# EAGLE board Interrdigitated-Electrode-V1 (EAGLE 9.5.2)
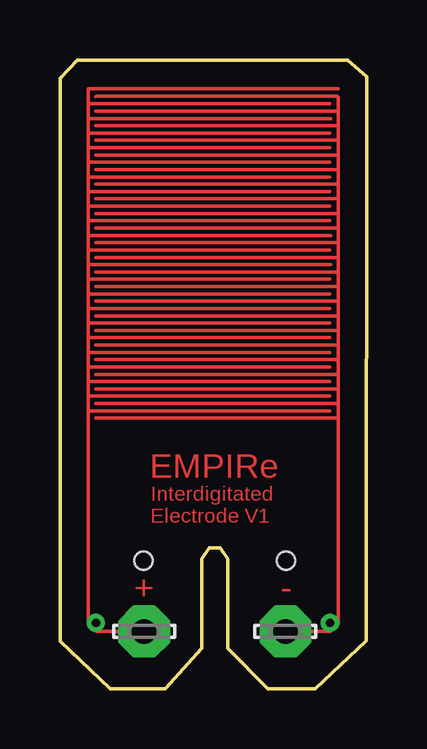
[diagram p0: board, top side]
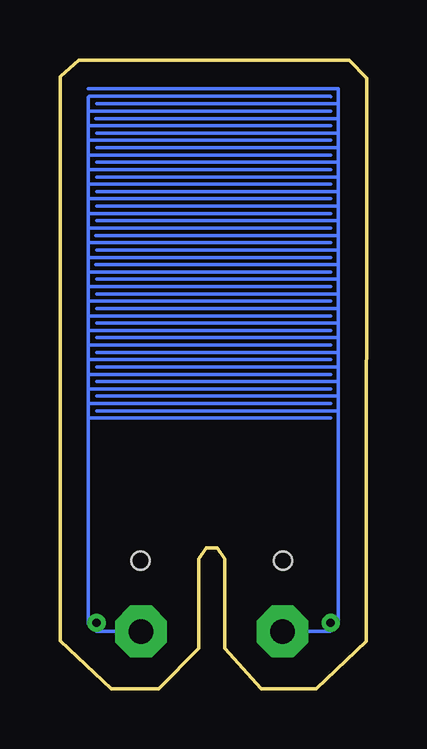
[diagram p1: board, bottom side, seen from below]

Size 12.77 x 26.21 mm. Coordinates in mm from the lower left corner, seen from the top.
Outline: 0.72,26.21 11.99,26.21 12.77,25.52 12.76,1.99 10.64,0 8.66,0 6.98,1.68 6.98,5.41 6.68,5.87 6.22,5.87 5.91,5.41 5.91,1.68 4.39,0 2.1,0 0.01,1.98 0,25.46 0.72,26.21
Copper layers (1*16): Top 0.035mm / dielectric 1.5mm / Bottom 0.035mm
Design rules "default": minimum track width 6mil, minimum drill 0.35mm, track to track 6mil, track to pad 6mil, pad to pad 6mil, via to via 6mil, smd to smd 6mil, copper to edge 40mil, drill to drill 6mil, minimum pad ring 10mil, minimum via ring 8mil, stop-mask expansion 4mil, vias tented up to drill 0mil, thermal gap 10mil
Holes 0.75 mm at 3.48,5.33 9.42,5.33

## Footprints (pad centres in the part's own frame; a part is rotated, then mirrored left to right if it is on the bottom)
LSP10 = drill 1.016 pad 2.159 octagon: MP 0,0

## Placement (x,y rotation side)
LSP1  LSP10  [LSP10]  9.39,2.38 0 top
LSP2  LSP10  [LSP10]  3.5,2.38 0 top
LSP3  LSP10  [LSP10]  9.39,2.38 0 top
LSP4  LSP10  [LSP10]  3.5,2.38 0 top

## Library data of the parts
LSP1-LSP4 = solpad

## Nets
0: LSP2.MP
1: LSP4.MP
VCC: LSP1.MP
VCC1: LSP3.MP

## Tracks (layer width: path | path; a pad name or v marks a point on that pad's centre or on a via)
0
  Top 0.152: LSP2.MP 1.5,2.38 1.18,2.7 1.18,11.58 | 1.18,11.58 1.18,12.19 | 1.18,12.19 1.18,12.8 | 1.18,12.8 1.18,13.41 | 1.18,13.41 1.18,14.02 | 1.18,14.02 1.18,14.63 | 1.18,14.63 1.18,15.24 | 1.18,15.24 1.18,15.85 | 1.18,15.85 1.18,16.46 | 1.18,16.46 1.18,17.07 | 1.18,17.07 1.18,17.68 | 1.18,17.68 1.18,18.29 | 1.18,18.29 1.18,18.9 | 1.18,18.9 1.18,19.51 | 1.18,19.51 1.18,20.12 | 1.18,20.12 1.18,20.73 | 1.18,20.73 1.18,21.34 | 1.18,21.34 1.18,21.95 | 1.18,21.95 1.18,22.55 | 1.18,22.55 1.18,23.16 | 1.18,23.16 1.18,23.77 | 1.18,23.77 1.18,24.38 | 1.18,24.38 1.18,25 11.58,25 | 1.18,24.38 11.25,24.38 | 1.18,23.77 11.28,23.77 | 1.18,23.16 11.25,23.16 | 1.18,22.55 11.25,22.55 | 1.18,21.95 11.25,21.95 | 1.18,21.34 11.25,21.34 | 1.18,20.73 11.25,20.73 | 1.18,20.12 11.25,20.12 | 1.18,19.51 11.25,19.51 | 1.18,18.9 11.28,18.9 | 1.18,18.29 11.25,18.29 | 1.18,17.68 11.28,17.68 | 1.18,17.07 11.25,17.07 | 1.18,16.46 11.25,16.46 | 1.18,15.85 11.25,15.85 | 11.25,15.24 1.18,15.24 | 1.18,14.63 11.25,14.63 | 1.18,14.02 11.25,14.02 | 1.18,13.41 11.25,13.41 | 1.18,12.8 11.25,12.8 | 1.18,12.19 11.25,12.19 | 1.18,11.58 11.25,11.58
1
  Bottom 0.152: LSP4.MP 1.5,2.38 1.18,2.7 1.18,11.58 | 1.18,11.58 1.18,12.19 | 1.18,12.19 1.18,12.8 | 1.18,12.8 1.18,13.41 | 1.18,13.41 1.18,14.02 | 1.18,14.02 1.18,14.63 | 1.18,14.63 1.18,15.24 | 1.18,15.24 1.18,15.85 | 1.18,15.85 1.18,16.46 | 1.18,16.46 1.18,17.07 | 1.18,17.07 1.18,17.68 | 1.18,17.68 1.18,18.29 | 1.18,18.29 1.18,18.9 | 1.18,18.9 1.18,19.51 | 1.18,19.51 1.18,20.12 | 1.18,20.12 1.18,20.73 | 1.18,20.73 1.18,21.34 | 1.18,21.34 1.18,21.95 | 1.18,21.95 1.18,22.55 | 1.18,22.55 1.18,23.16 | 1.18,23.16 1.18,23.77 | 1.18,23.77 1.18,24.38 | 1.18,24.38 1.18,25 11.58,25 | 1.18,24.38 11.25,24.38 | 1.18,23.77 11.28,23.77 | 1.18,23.16 11.25,23.16 | 1.18,22.55 11.25,22.55 | 1.18,21.95 11.25,21.95 | 1.18,21.34 11.25,21.34 | 1.18,20.73 11.25,20.73 | 1.18,20.12 11.25,20.12 | 1.18,19.51 11.25,19.51 | 1.18,18.9 11.28,18.9 | 1.18,18.29 11.25,18.29 | 1.18,17.68 11.28,17.68 | 1.18,17.07 11.25,17.07 | 1.18,16.46 11.25,16.46 | 1.18,15.85 11.25,15.85 | 11.25,15.24 1.18,15.24 | 1.18,14.63 11.25,14.63 | 1.18,14.02 11.25,14.02 | 1.18,13.41 11.25,13.41 | 1.18,12.8 11.25,12.8 | 1.18,12.19 11.25,12.19 | 1.18,11.58 11.25,11.58
N$1  (via drill 0.35)
  other vias: 1.49,2.74
N$2  (via drill 0.35)
  other vias: 11.25,2.74
N$3  (via drill 0.35)
  other vias: 1.49,2.74
N$4  (via drill 0.35)
  other vias: 11.25,2.74
VCC
  Top 0.152: LSP1.MP 11.26,2.38 11.58,2.7 11.58,11.28 | 1.49,24.69 1.51,24.7 11.55,24.7 11.58,24.67 11.58,24.08 | 11.58,11.28 11.58,11.89 | 11.58,11.89 11.58,12.5 | 11.58,12.5 11.58,13.11 | 11.58,13.11 11.58,13.72 | 11.58,13.72 11.58,14.33 | 11.58,14.33 11.58,14.93 | 11.58,14.93 11.58,15.54 | 11.58,15.54 11.58,16.15 | 11.58,16.15 11.58,16.76 | 11.58,16.76 11.58,17.37 | 11.58,17.37 11.58,17.98 | 11.58,17.98 11.58,18.59 | 11.58,18.59 11.58,19.2 | 11.58,19.2 11.58,19.81 | 11.58,19.81 11.58,20.42 | 11.58,20.42 11.58,21.03 | 11.58,21.03 11.58,21.64 | 11.58,21.64 11.58,22.25 | 11.58,22.25 11.58,22.86 | 11.58,22.86 11.58,23.47 | 11.58,23.47 11.58,24.08 | 11.58,24.08 1.49,24.08 | 11.58,23.47 1.49,23.47 | 11.58,22.86 1.49,22.86 | 11.58,22.25 1.49,22.25 | 11.58,21.64 1.49,21.64 | 11.58,21.03 1.49,21.03 | 11.58,20.42 1.49,20.42 | 11.58,19.81 1.49,19.81 | 11.58,19.2 1.49,19.2 | 11.58,18.59 1.49,18.59 | 11.58,17.98 1.49,17.98 | 11.58,17.37 1.49,17.37 | 11.58,16.76 1.49,16.76 | 11.58,16.15 1.49,16.15 | 11.58,15.54 1.49,15.54 | 11.58,14.93 1.49,14.93 | 11.58,14.33 1.49,14.33 | 11.58,13.72 1.49,13.72 | 11.58,13.11 1.49,13.11 | 11.58,12.5 1.49,12.5 | 1.49,11.89 11.58,11.89 | 11.58,11.28 1.49,11.28
VCC1
  Bottom 0.152: LSP3.MP 11.26,2.38 11.58,2.7 11.58,11.28 | 1.49,24.69 1.51,24.7 11.55,24.7 11.58,24.67 11.58,24.08 | 11.58,11.28 11.58,11.89 | 11.58,11.89 11.58,12.5 | 11.58,12.5 11.58,13.11 | 11.58,13.11 11.58,13.72 | 11.58,13.72 11.58,14.33 | 11.58,14.33 11.58,14.93 | 11.58,14.93 11.58,15.54 | 11.58,15.54 11.58,16.15 | 11.58,16.15 11.58,16.76 | 11.58,16.76 11.58,17.37 | 11.58,17.37 11.58,17.98 | 11.58,17.98 11.58,18.59 | 11.58,18.59 11.58,19.2 | 11.58,19.2 11.58,19.81 | 11.58,19.81 11.58,20.42 | 11.58,20.42 11.58,21.03 | 11.58,21.03 11.58,21.64 | 11.58,21.64 11.58,22.25 | 11.58,22.25 11.58,22.86 | 11.58,22.86 11.58,23.47 | 11.58,23.47 11.58,24.08 | 11.58,24.08 1.49,24.08 | 11.58,23.47 1.49,23.47 | 11.58,22.86 1.49,22.86 | 11.58,22.25 1.49,22.25 | 11.58,21.64 1.49,21.64 | 11.58,21.03 1.49,21.03 | 11.58,20.42 1.49,20.42 | 11.58,19.81 1.49,19.81 | 11.58,19.2 1.49,19.2 | 11.58,18.59 1.49,18.59 | 11.58,17.98 1.49,17.98 | 11.58,17.37 1.49,17.37 | 11.58,16.76 1.49,16.76 | 11.58,16.15 1.49,16.15 | 11.58,15.54 1.49,15.54 | 11.58,14.93 1.49,14.93 | 11.58,14.33 1.49,14.33 | 11.58,13.72 1.49,13.72 | 11.58,13.11 1.49,13.11 | 11.58,12.5 1.49,12.5 | 1.49,11.89 11.58,11.89 | 11.58,11.28 1.49,11.28

## Text on the board
Top: EMPIRe | Interdigitated / Electrode V1 | + | -